# Altium PCB PCB1.PcbDoc (part 5 of 5)
Units mm, origin at the board's own origin, x right, y up, seen from the top; angles counter-clockwise.
Board outline 160 x 110 mm, 4 copper layers (Top Layer, Power Layer, GND Layer, Bottom Layer), stack 1.714 mm thick; 504 components, 362 nets, 1765 pads, 999 vias.
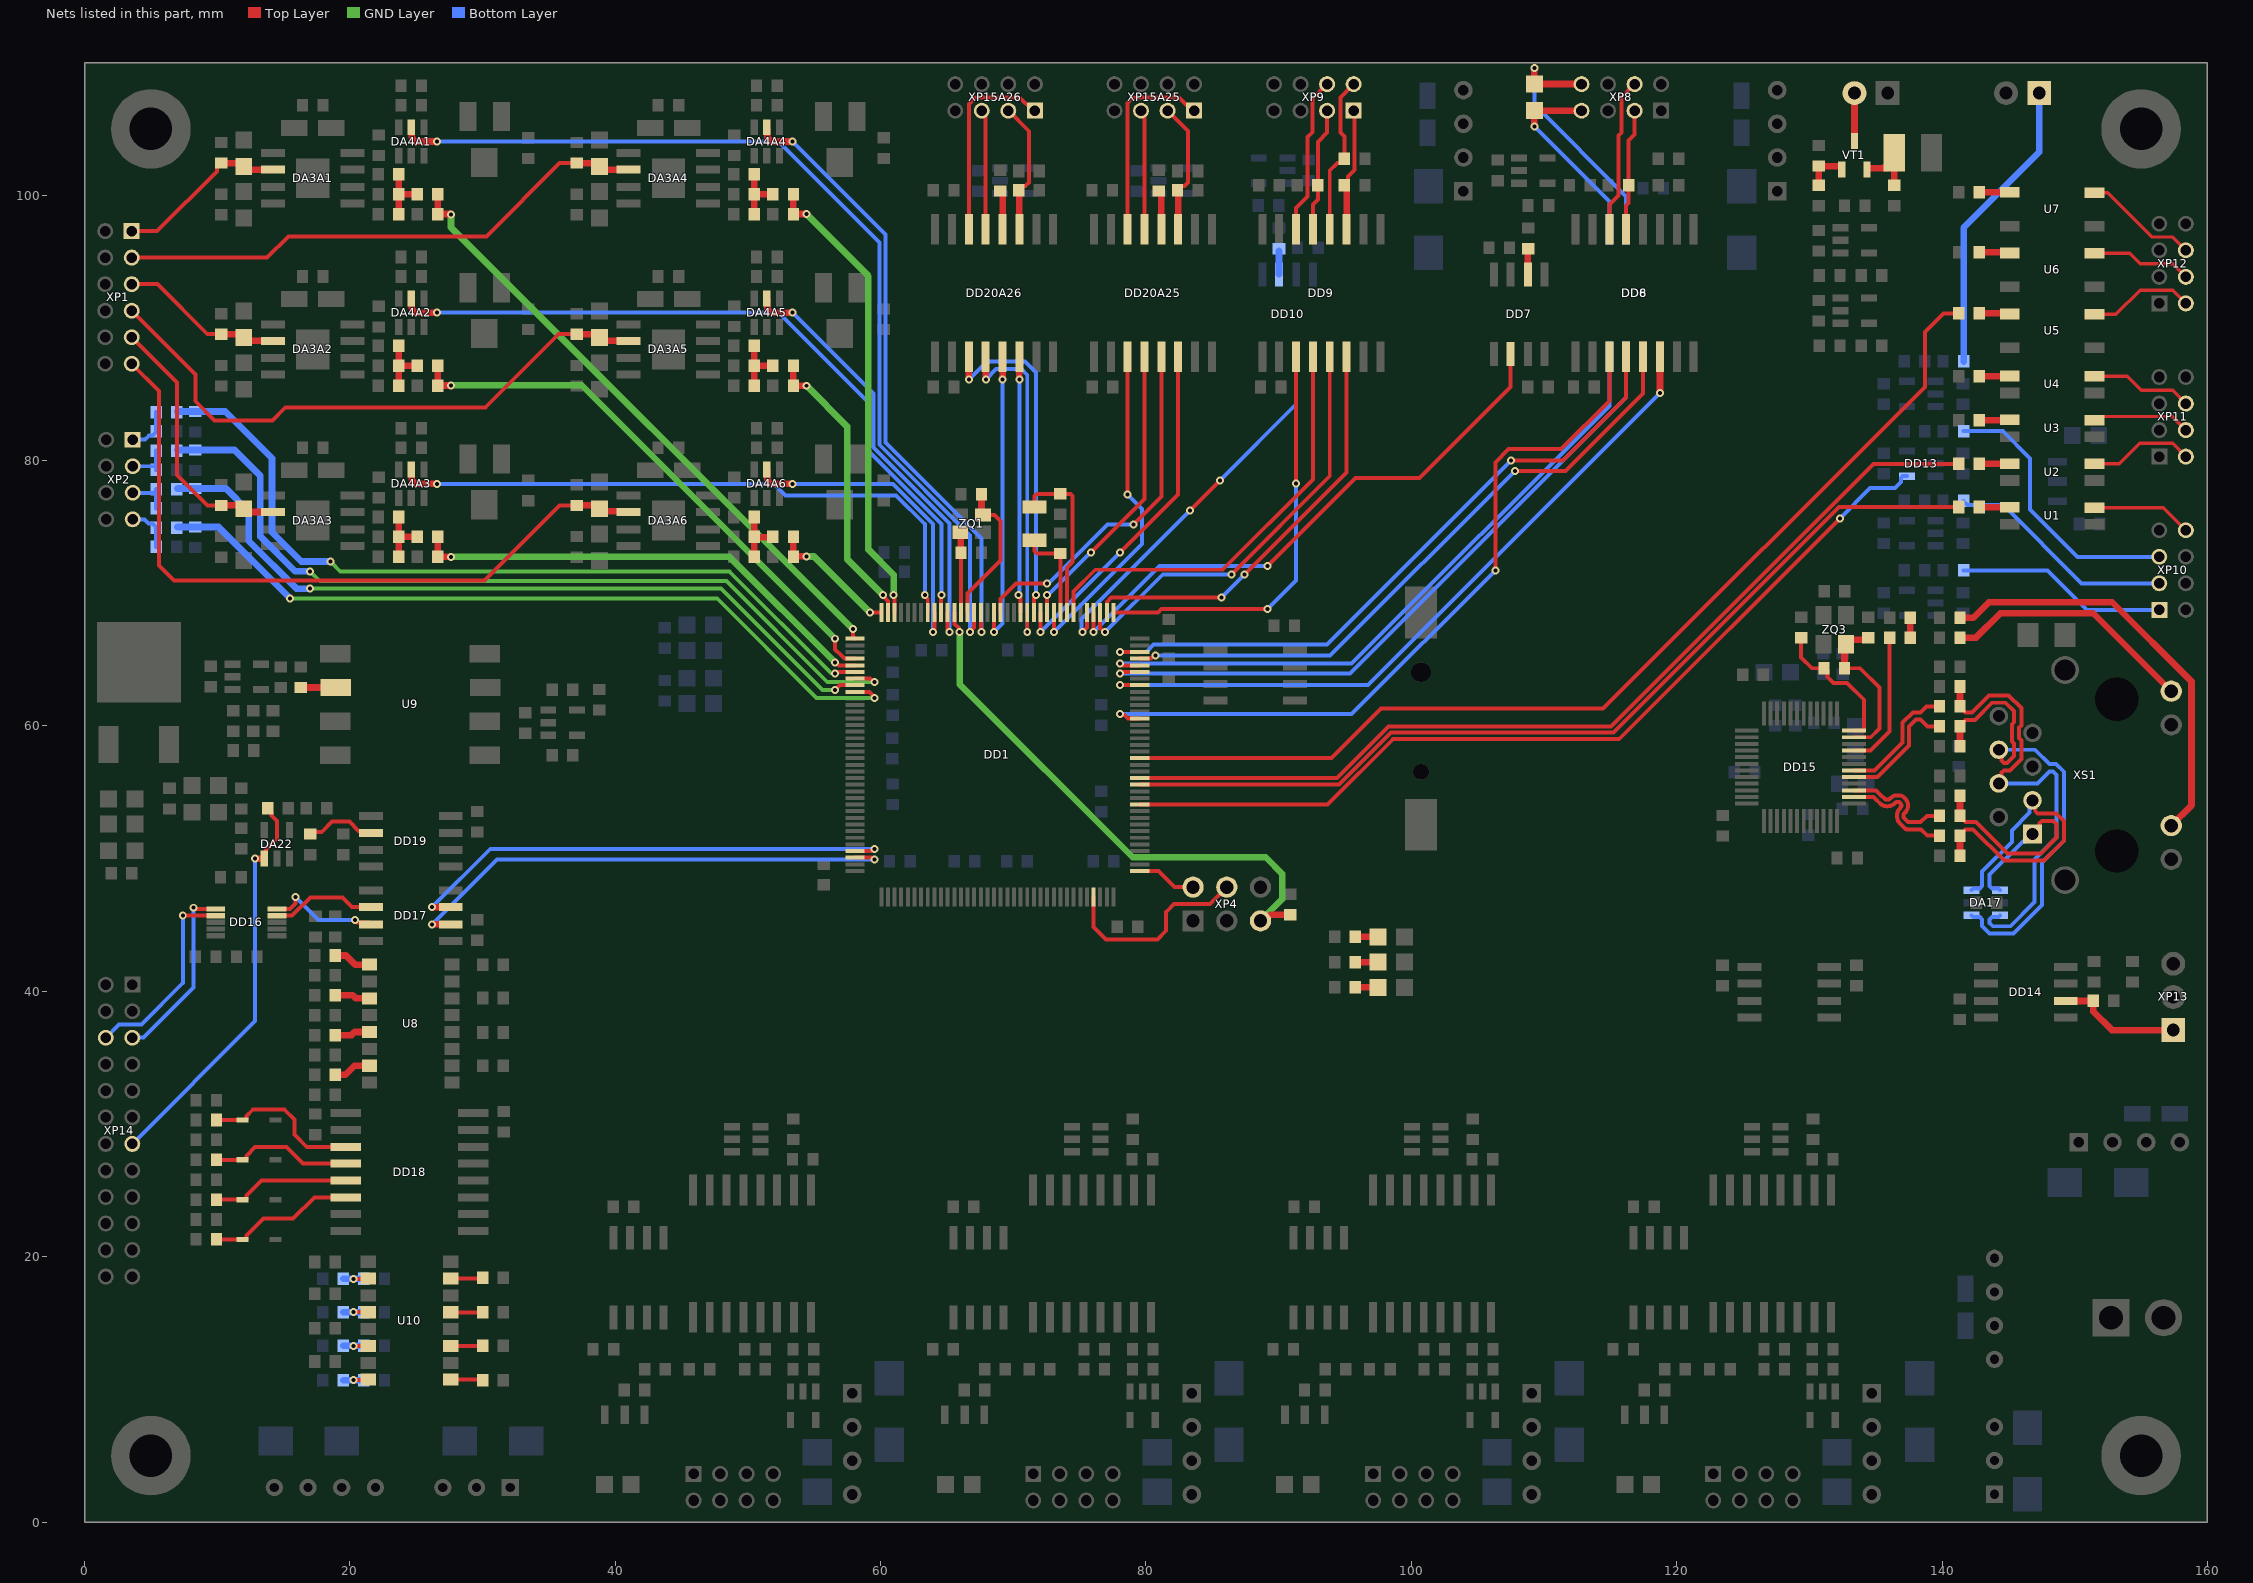
[diagram p6: the nets of this part, all layers, seen from the top]

## Via types
v1: diameter 0.6, hole 0.3, Top Layer to Bottom Layer, tented both sides, 927 vias
v2: diameter 0.6, hole 0.3, Top Layer to Bottom Layer, 72 vias

## Nets (pads, with @x,y where several pads share a name; then routed paths per layer and width w, separated by ;. In a path a pad name is that pad's centre, name@x,y a point inside that pad or via, vN(x,y) a via of type N, cw(c..) or ccw(c..) an arc to the next point about the centre after c; other vN are vias at no path point) (continued)
NetDD6_5: DD6.5 R35.2 XP8.3 | length 9.2
  Top Layer w0.3: DD6.5@116.195,97.428 116.195,99.245 116.375,99.425 R35.2@116.375,100.75 ; R35.2@116.375,100.763 116.375,104.125 116.825,104.575 XP8.3@116.825,106.388
NetDD6_6: DD6.6 XP8.4 | length 11.7
  Top Layer w0.3: DD6.6@114.925,97.428 114.925,99.313 115.6,99.988 115.6,104.488 115.825,104.713 115.825,107.388 XP8.4@116.825,108.388
NetDD7_6: DD7.6 R31.1 | length 2
  Top Layer w0.5: DD7.6@108.776,94.037 R31.1@108.775,96.037
NetDD8_11: DD8.11 R33.1 XP8.7 | length 14.8
  Top Layer w0.5: v1(109.275,105.188) R33.1@109.275,106.388 ; R33.1@109.287,106.375 XP8.7@112.825,106.375
  Bottom Layer w0.3: v1(109.275,105.188) 114.925,99.537 DD8.11@114.925,97.428
NetDD8_12: DD8.12 R33.2 XP8.8 | length 19.8
  Top Layer w0.5: v1(109.275,109.588) R33.2@109.275,108.388 XP8.8@112.812,108.388
  Bottom Layer w0.3: v1(109.275,109.588) 109.275,106.825 116.195,99.905 DD8.12@116.195,97.428
NetDD9_3: DD9.3 R37.2 XP9.1 | length 9.3
  Top Layer w0.3: R37.2@94.95,100.75 95.035,100.835 95.225,101.025 95.225,101.4 95.731,101.906 95.731,106.294 XP9.1@95.65,106.375 ; DD9.3@95.12,97.428 DD9.3@95.122,97.431
  Top Layer w0.5: DD9.3@95.122,97.431 R37.2@95.122,100.747
NetDD9_4: DD9.4 R38.2 XP9.2 | length 12.1
  Top Layer w0.3: DD9.4@93.85,97.428 93.85,101.85 94.425,102.425 94.675,102.425 94.95,102.7 94.95,104.425 94.65,104.725 94.65,107.375 XP9.2@95.65,108.375
NetDD9_5: DD9.5 R39.2 XP9.3 | length 9.4
  Top Layer w0.3: DD9.5@92.58,97.428 92.58,99.305 92.95,99.675 R39.2@92.95,100.75 92.95,104.025 93.65,104.725 XP9.3@93.65,106.375
NetDD9_6: DD9.6 XP9.4 | length 11.9
  Top Layer w0.3: DD9.6@91.31,97.428 91.31,99.035 92.175,99.9 92.175,104.375 92.55,104.75 92.55,107.275 XP9.4@93.65,108.375
NetDD10_6: DD10.6 R36.1 | length 1.8
  Bottom Layer w0.5: R36.1@90,95.8 90.025,95.8 DD10.6@90.025,94.037
NetDD14_2: DD14.2 R53.1 XP13.1 | length 9.5
  Top Layer w0.5: DD14.2@149.325,39.275 R53.1@151.4,39.275 151.4,38.475 152.8,37.075 XP13.1@157.425,37.075
NetDD15_9: DD15.9 R66.2 | length 10.3
  Top Layer w0.3: DD15.9@133.375,58.15 134.6,58.15 136.05,59.6 R66.2@136.05,66.662
NetDD16_4: DD16.4 DD17.6 | length 8
  Top Layer w0.3: DD16.4@14.5,45.7 15.65,45.7 17.025,47.075 19.425,47.075 20.15,46.35 DD17.6@21.6,46.35
NetDD16_5: DD16.5 DD17.7 | length 8.6
  Top Layer w0.3: DD16.5@14.5,46.2 15.475,46.2 15.9,46.625 v1(15.9,47.1) ; v1(20.375,45.375) 20.406,45.375 20.581,45.2 21.45,45.2 DD17.7@21.6,45.05
  Bottom Layer w0.3: v1(15.9,47.1) 17.625,45.375 v1(20.375,45.375)
NetDD18_3: DD18.3 R86.2 VD7.1 | length 12.1
  Top Layer w0.3: R86.2@9.95,30.3 9.975,30.325 10,30.3 VD7.1@11.9,30.3 12.15,30.3 12.2,30.35 12.2,30.6 12.675,31.075 15.075,31.075 15.825,30.325 15.825,29.2 16.745,28.28 DD18.3@19.7,28.28
NetDD18_4: DD18.4 R80.2 VD6.1 | length 10.8
  Top Layer w0.3: R80.2@9.95,27.3 12.15,27.3 12.2,27.35 12.2,27.6 12.85,28.25 15.225,28.25 16.465,27.01 DD18.4@19.7,27.01
NetDD18_5: DD18.5 R87.2 VD5.1 | length 10.5
  Top Layer w0.3: R87.2@9.95,24.3 12.15,24.3 12.2,24.35 12.2,24.6 13.34,25.74 DD18.5@19.7,25.74
NetDD18_6: DD18.6 R81.2 VD4.1 | length 11
  Top Layer w0.3: R81.2@9.95,21.3 VD4.1@11.75,21.3 ; VD4.1@11.7,21.35 VD4.1@11.75,21.3 ; VD4.1@11.9,21.3 VD4.1@11.75,21.3 ; VD4.1@12.2,21.35 12.2,21.6 13.475,22.875 15.725,22.875 17.32,24.47 DD18.6@19.7,24.47
NetDD19_6: DD19.6 R104.1 | length 5.2
  Top Layer w0.3: R104.1@17,51.85 17.175,52.025 17.875,52.025 18.65,52.8 19.95,52.8 20.65,52.1 21.438,52.1 DD19.6@21.513,52.025
NetDD20A25_11: DD20A25.11 R118A25.2 XP15A25.3 | length 10.7
  Top Layer w0.3: XP15A25.3@81.625,106.375 83.15,104.85 83.15,100.95 82.9,100.7 82.65,100.7 82.56,100.61 R118A25.2@82.56,100.535 ; DD20A25.11@82.425,96.586 DD20A25.11@82.425,97.425
  Top Layer w0.5: R118A25.2@82.375,100.375 82.425,100.325 DD20A25.11@82.425,97.425
NetDD20A25_12: DD20A25.12 R117A25.1 | length 3.8
  Top Layer w0.3: R117A25.1@80.875,100.325 80.88,100.325 R117A25.1@81.155,100.05
  Top Layer w0.5: DD20A25.12@81.155,96.606 R117A25.1@81.155,100.05
NetDD20A25_13: DD20A25.13 XP15A25.5 | length 9.1
  Top Layer w0.3: XP15A25.5@79.625,106.375 79.625,106.131 79.885,105.871 DD20A25.13@79.885,97.425
NetDD20A25_14: DD20A25.14 XP15A25.1 | length 15
  Top Layer w0.3: DD20A25.14@78.615,97.425 78.615,106.94 79.05,107.375 82.475,107.375 XP15A25.1@83.475,106.375
NetDD20A26_11: DD20A26.11 R118A26.2 XP15A26.3 | length 10
  Top Layer w0.3: XP15A26.3@69.625,106.375 71.175,104.825 71.175,100.975 70.9,100.7 70.6,100.7 R118A26.2@70.425,100.525
  Top Layer w0.5: R118A26.2@70.4,100.375 70.46,100.315 DD20A26.11@70.46,97.425
NetDD20A26_12: DD20A26.12 R117A26.1 | length 3.1
  Top Layer w0.3: R117A26.1@69,100.4 R117A26.1@69.19,100.21
  Top Layer w0.5: DD20A26.12@69.19,97.425 R117A26.1@69.19,100.21
NetDD20A26_13: DD20A26.13 XP15A26.5 | length 9.1
  Top Layer w0.3: XP15A26.5@67.625,106.375 67.625,106.131 67.92,105.836 DD20A26.13@67.92,97.425
NetDD20A26_14: DD20A26.14 XP15A26.1 | length 15.6
  Top Layer w0.3: DD20A26.14@66.65,96.743 66.65,106.875 67.15,107.375 70.475,107.375 XP15A26.1@71.475,106.375
NetR4_2: R4.2 VD1.1 | length 1.7
  Top Layer w0.5: R4.2@95.775,40.3 VD1.1@97.475,40.3
NetR5_2: R5.2 VD2.1 | length 1.7
  Top Layer w0.5: R5.2@95.775,42.2 VD2.1@97.476,42.2
NetR6_2: R6.2 VD3.1 | length 1.7
  Top Layer w0.5: R6.2@95.775,44.1 VD3.1@97.476,44.1
NetR11A1_2: R11A1.2 R12A1.1 R13A1.1 R14A1.1 | length 4.4
  Top Layer w0.5: R12A1.1@23.675,98.583 R11A1.2@23.675,100.083 ; R14A1.1@23.675,101.575 R11A1.2@23.675,100.083 ; R13A1.1@25.075,100.083 R11A1.2@23.675,100.083
NetR11A2_2: R11A2.2 R12A2.1 R13A2.1 R14A2.1 | length 4.4
  Top Layer w0.5: R12A2.1@23.675,85.658 R11A2.2@23.675,87.158 ; R14A2.1@23.675,88.65 R11A2.2@23.675,87.158 ; R13A2.1@25.075,87.158 R11A2.2@23.675,87.158
NetR11A3_2: R11A3.2 R12A3.1 R13A3.1 R14A3.1 | length 4.4
  Top Layer w0.5: R12A3.1@23.675,72.758 23.675,74.258 R13A3.1@25.075,74.258 ; R11A3.2@23.675,74.25 R14A3.1@23.675,75.75
NetR11A4_2: R11A4.2 R12A4.1 R13A4.1 R14A4.1 | length 4.4
  Top Layer w0.5: R12A4.1@50.475,98.583 R11A4.2@50.475,100.083 ; R14A4.1@50.475,101.575 R11A4.2@50.475,100.083 ; R13A4.1@51.875,100.083 R11A4.2@50.475,100.083
NetR11A5_2: R11A5.2 R12A5.1 R13A5.1 R14A5.1 | length 4.4
  Top Layer w0.5: R12A5.1@50.475,85.65 R11A5.2@50.475,87.15 R14A5.1@50.475,88.65 ; R11A5.2@50.483,87.158 R13A5.1@51.867,87.158
NetR11A6_2: R11A6.2 R12A6.1 R13A6.1 R14A6.1 | length 4.4
  Top Layer w0.5: R12A6.1@50.475,72.758 R11A6.2@50.475,74.258 ; R14A6.1@50.475,75.75 50.475,74.225 R13A6.1@51.875,74.225
NetR22_2: R22.2 R24.2 VT1.1 | length 3.4
  Top Layer w0.5: R22.2@130.7,100.75 R24.2@130.7,102.2 132.325,102.2 132.45,102.075 VT1.1@132.45,101.95
NetR23_2: R23.2 R25.2 VT1.2 | length 4.3
  Top Layer w0.5: VT1.2@134.35,101.95 134.35,102.019 134.375,102.044 135.557,102.044 135.563,102.05 135.85,102.05 R25.2@136.4,102.6 ; R23.2@136.4,100.75 R25.2@136.4,102.6 ; R25.2@136.4,102.694 R25.2@136.4,102.6
NetR26_1: R26.1 XP6.1 | length 22.6
  Bottom Layer w0.5: R26.1@141.625,87.475 141.625,97.55 147.325,103.25 XP6.1@147.325,107.7
NetR40_1: R40.1 XP10.1 | length 16
  Bottom Layer w0.3: R40.1@141.625,71.725 147.95,71.725 150.925,68.75 XP10.1@156.375,68.75
NetR41_1: R41.1 XP10.3 | length 17.4
  Bottom Layer w0.3: R41.1@141.625,76.975 141.625,76.925 141.9,76.65 144.625,76.65 150.525,70.75 XP10.3@156.375,70.75
NetR42_1: R42.1 XP10.5 | length 20.9
  Bottom Layer w0.3: R42.1@141.625,82.225 144.575,82.225 146.625,80.175 146.625,76.325 150.2,72.75 XP10.5@156.375,72.75
NetR46_1: R46.1 U1.1 | length 2.3
  Top Layer w0.254: R46.1@142.8,76.5 R46.1@142.825,76.475
  Top Layer w0.5: R46.1@142.825,76.475 U1.1@145.1,76.475
NetR47_1: R47.1 U2.1 | length 2.3
  Top Layer w0.254: U2.1@145.075,79.75 U2.1@145.1,79.775
  Top Layer w0.5: R47.1@142.8,79.75 U2.1@145.075,79.75
NetR48_1: R48.1 U3.1 | length 2.3
  Top Layer w0.254: U3.1@145.075,83.05 U3.1@145.1,83.075
  Top Layer w0.5: R48.1@142.8,83.05 U3.1@145.075,83.05
NetR49_1: R49.1 U4.1 | length 2.3
  Top Layer w0.254: U4.1@145.075,86.35 U4.1@145.1,86.375
  Top Layer w0.5: R49.1@142.8,86.35 U4.1@145.075,86.35
NetR50_1: R50.1 U5.1 | length 2.3
  Top Layer w0.254: U5.1@145.05,91.1 U5.1@145.1,91.05
  Top Layer w0.5: R50.1@142.8,91.1 U5.1@145.05,91.1
NetR51_1: R51.1 U6.1 | length 2.3
  Top Layer w0.254: U6.1@145.05,95.7 U6.1@145.1,95.65
  Top Layer w0.5: R51.1@142.8,95.7 U6.1@145.05,95.7
NetR52_1: R52.1 U7.1 | length 2.3
  Top Layer w0.5: R52.1@142.8,100.225 U7.1@145.1,100.225
NetR60_1: R60.1 XS1.10 | length 31.9
  Top Layer w0.5: R60.1@141.35,68.162 142.362,68.162 143.525,69.325 152.825,69.325 158.8,63.35 158.8,54.014 XS1.10@157.275,52.489
NetR63_1: R63.1 XS1.12 | length 19.1
  Top Layer w0.5: R63.1@141.35,66.662 142.562,66.662 144.4,68.5 151.395,68.5 XS1.12@157.275,62.619
NetR64_2: R64.2 R66.1 | length 1.5
  Top Layer w0.5: R66.1@137.6,66.662 R64.2@137.6,68.162
NetR82_2: R82.2 U8.1 | length 2.9
  Top Layer w0.5: R82.2@18.9,42.7 19.7,42.7 20.39,42.01 U8.1@21.48,42.01
NetR83_2: R83.2 U8.3 | length 2.7
  Top Layer w0.5: R83.2@18.9,39.7 20.225,39.7 20.455,39.47 U8.3@21.48,39.47
NetR84_2: R84.2 U8.5 | length 2.7
  Top Layer w0.5: R84.2@18.9,36.7 20.125,36.7 20.355,36.93 U8.5@21.48,36.93
NetR85_2: R85.2 U8.7 | length 2.9
  Top Layer w0.5: R85.2@18.9,33.7 19.65,33.7 20.34,34.39 U8.7@21.48,34.39
NetR88_2: R88.2 U9.2 | length 2.6
  Top Layer w0.5: R88.2@16.3,62.9 U9.2@18.925,62.9
NetR96_1: R96.1 U10.1 | length 2.4
  Top Layer w0.3: U10.1@27.6,10.73 29.97,10.73 R96.1@30,10.7
NetR97_1: R97.1 U10.3 | length 2.4
  Top Layer w0.3: U10.3@27.6,13.27 29.97,13.27 R97.1@30,13.3
NetR98_1: R98.1 U10.5 | length 2.4
  Top Layer w0.3: U10.5@27.6,15.81 29.99,15.81 R98.1@30,15.8
NetR99_1: R99.1 U10.7 | length 2.4
  Top Layer w0.3: U10.7@27.6,18.35 29.95,18.35 R99.1@30,18.4
NetR100_1: R100.1 R105.1 U10.16 | length 2.7
  Top Layer w0.3: v1(20.275,10.7) 21.35,10.7 U10.16@21.38,10.73
  Bottom Layer w0.5: R105.1@19.5,10.7 v1(20.275,10.7) R100.1@21.05,10.7
NetR101_1: R101.1 R106.1 U10.14 | length 2.7
  Top Layer w0.3: v1(20.275,13.275) 21.375,13.275 U10.14@21.38,13.27
  Bottom Layer w0.5: R106.1@19.5,13.275 v1(20.275,13.275) R101.1@21.05,13.275
NetR102_1: R102.1 R107.1 U10.12 | length 2.7
  Top Layer w0.3: v1(20.275,15.825) 21.365,15.825 U10.12@21.38,15.81
  Bottom Layer w0.5: R107.1@19.5,15.8 20.275,15.8 R102.1@21.05,15.8
NetR103_1: R103.1 R108.1 U10.10 | length 2.7
  Top Layer w0.3: v1(20.275,18.325) 21.355,18.325 U10.10@21.38,18.35
  Bottom Layer w0.5: R108.1@19.5,18.325 v1(20.275,18.325) R103.1@21.05,18.325
NetU1_4: U1.4 XP10.8 | length 7.6
  Top Layer w0.254: U1.4@151.5,76.45 156.675,76.45 XP10.8@158.375,74.75
NetU2_4: U2.4 XP11.2 | length 7.9
  Top Layer w0.254: U2.4@151.5,79.75 153.35,79.75 154.9,81.3 157.385,81.3 XP11.2@158.385,80.3
NetU3_4: U3.4 XP11.4 | length 7.4
  Top Layer w0.254: U3.4@151.5,83.05 151.773,83.323 152.27,83.323 152.272,83.325 157.36,83.325 XP11.4@158.385,82.3
NetU4_4: U4.4 XP11.6 | length 7.7
  Top Layer w0.254: U4.4@151.5,86.35 153.95,86.35 155,85.3 157.385,85.3 XP11.6@158.385,84.3
NetU5_6: U5.6 XP12.2 | length 8.1
  Top Layer w0.254: U5.6@151.5,91.025 153.1,91.025 154.925,92.85 157.385,92.85 XP12.2@158.385,91.85
NetU6_6: U6.6 XP12.4 | length 7.6
  Top Layer w0.254: U6.6@151.5,95.625 154.15,95.625 154.925,94.85 157.385,94.85 XP12.4@158.385,93.85
NetU7_6: U7.6 XP12.6 | length 8.7
  Top Layer w0.254: U7.6@151.5,100.2 152.5,100.2 155.85,96.85 157.385,96.85 XP12.6@158.385,95.85
NetVT1_3: VT1.3 XP5.2 | length 3.6
  Top Layer w0.5: VT1.3@133.4,104.1 XP5.2@133.4,107.7
NRST: C20.1 DD1.25 XP4.5 | length 42.5
  Top Layer w0.3: DD1.25@65.55,68.55 65.55,67.76 ccw(c65.635,67.76) 65.575,67.7 65.893,67.382 65.893,67.132 v1(65.95,67.075)
  Top Layer w0.5: XP4.5@88.63,45.31 88.928,45.31 89.393,45.775 C20.1@90.875,45.775
  GND Layer w0.5: v1(65.95,67.075) 65.95,63.15 79,50.1 89.025,50.1 90.275,48.85 90.275,46.955 XP4.5@88.63,45.31
OSC32_IN: C13.1 DD1.8 ZQ2.2 | length 12.8
  Top Layer w0.3: ZQ2.2@71.6,76.5 71.6,77.324 71.776,77.5 74.299,77.5 74.475,77.324 74.475,72.35 74.05,71.925 DD1.8@74.05,68.55
OSC32_OUT: C7.1 DD1.9 ZQ2.1 | length 7.3
  Top Layer w0.3: ZQ2.1@71.6,74 71.6,73.176 71.776,73 C7.1@73.55,73 73.55,72.85 73.55,69.125 DD1.9@73.55,68.55
OSC_IN: C12.1 DD1.23 ZQ1.3 | length 11
  Top Layer w0.3: DD1.23@66.55,68.55 66.55,70 69.025,72.475 69.025,75.45 68.575,75.9 ZQ1.3@67.7,75.9
  Top Layer w0.5: C12.1@67.6,77.45 67.6,76 ZQ1.3@67.7,75.9
OSC_OUT: C6.1 DD1.24 ZQ1.1 | length 6.1
  Top Layer w0.3: DD1.24@66.05,68.55 C6.1@66.05,73.05
  Top Layer w0.5: ZQ1.1@66,74.6 66.05,74.55 C6.1@66.05,73.05
PD1: C30A1.2 DA3A1.2 R10A1.2 XP1.1 | length 13.2
  Top Layer w0.3: XP1.1@3.55,97.3 5.475,97.3 9.982,101.807 9.982,102.15 10.257,102.425 C30A1.2@10.3,102.425
  Top Layer w0.5: C30A1.2@10.3,102.425 11.75,102.425 12.25,101.925 DA3A1.2@14.2,101.925
PD1_ADC: C33A1.1 DD1.37 R13A1.2 | length 47.1
  Top Layer w0.3: v1(57.9,67.3) 57.9,66.575 DD1.37@58.075,66.575
  Top Layer w0.5: C33A1.1@26.625,98.575 C33A1.1@26.629,98.571 ; C33A1.1@26.625,98.583 26.625,99.154 R13A1.2@26.625,100.083 ; C33A1.1@26.7,98.586 27.581,98.586 v1(27.6,98.567)
  GND Layer w0.5: v1@27.6,98.575 27.619,98.556 27.619,97.581 v1(57.9,67.3)
PD1_ERR: DA4A1.5 DD1.22 | length 73.1
  Top Layer w0.3: v1(66.75,67.075) 66.75,67.129 67.05,67.429 DD1.22@67.05,68.55
  Top Layer w0.5: DA4A1.5@24.625,105.125 24.65,105.1 24.65,104.35 24.95,104.05 v1(26.55,104.05)
  Bottom Layer w0.3: v1(26.55,104.05) 52.3,104.05 59.9,96.45 59.9,81.196 66.75,74.346 v1(66.75,67.075)
PD2: C30A4.2 DA3A4.2 R10A4.2 XP1.3 | length 40.8
  Top Layer w0.3: XP1.3@3.55,95.3 13.75,95.3 15.354,96.904 30.279,96.904 35.8,102.425 C30A4.2@37.1,102.425
  Top Layer w0.5: C30A4.2@37.1,102.425 38.55,102.425 R10A4.2@38.8,102.175 ; R10A4.2@38.675,102.3 39.05,101.925 DA3A4.2@41,101.925
PD2_ADC: C33A4.1 DD1.34 R13A4.2 | length 35.3
  Top Layer w0.3: v1(60.975,69.875) 60.975,69.794 61.05,69.719 DD1.34@61.05,68.55
  Top Layer w0.5: C33A4.1@53.425,98.583 R13A4.2@53.425,100.083 ; C33A4.1@53.429,98.584 v1@54.399,98.584
  GND Layer w0.5: v1(54.4,98.584) 59.075,93.909 59.075,73.3 60.975,71.4 v1(60.975,69.875)
PD2_ERR: DA4A4.5 DD1.21 | length 47.2
  Top Layer w0.3: DD1.21@67.55,68.55 67.55,67.125 v1(67.6,67.075)
  Top Layer w0.5: DA4A4.5@51.425,105.125 51.45,105.1 51.45,104.343 51.743,104.05 v1(53.35,104.05)
  Bottom Layer w0.3: v1(53.35,104.05) 60.35,97.05 60.35,81.382 67.6,74.132 v1(67.6,67.075)
PD3: C30A2.2 DA3A2.2 R10A2.2 XP1.5 | length 12.4
  Top Layer w0.3: XP1.5@3.55,93.3 5.5,93.3 9.275,89.525 C30A2.2@10.3,89.525
  Top Layer w0.5: C30A2.2@10.3,89.525 11.75,89.525 12.25,89.025 DA3A2.2@14.2,89.025
PD3_ADC: C33A2.1 DD1.40 R13A2.2 | length 42
  Top Layer w0.3: v1(56.575,66.575) 56.575,65.776 57.05,65.301 57.276,65.075 DD1.40@58.075,65.075
  Top Layer w0.5: C33A2.1@26.625,85.65 26.634,85.659 27.591,85.659 v1(27.6,85.667) ; C33A2.1@26.625,85.658 R13A2.2@26.625,87.158
  GND Layer w0.5: v1@27.6,85.675 37.475,85.675 v1(56.575,66.575)
PD3_ERR: DA4A2.5 DD1.27 | length 56.3
  Top Layer w0.3: DD1.27@64.55,68.55 64.55,69.85 v1(64.575,69.875)
  Top Layer w0.5: DA4A2.5@24.625,92.225 24.65,92.2 24.65,91.443 24.943,91.15 v1(26.55,91.15)
  Bottom Layer w0.3: v1(26.55,91.15) 52.3,91.15 59,84.45 59,80.814 64.575,75.239 v1(64.575,69.875)
PD4: C30A5.2 DA3A5.2 R10A5.2 XP1.7 | length 45.3
  Top Layer w0.3: XP1.7@3.55,91.3 8.35,86.5 8.35,84.475 9.8,83.025 14.15,83.025 15.125,84 30.2,84 35.725,89.525 C30A5.2@37.1,89.525
  Top Layer w0.5: C30A5.2@37.1,89.525 R10A5.2@38.55,89.525 ; R10A5.2@38.8,89.275 R10A5.2@38.55,89.525 ; DA3A5.2@41,89.025 39.05,89.025 R10A5.2@38.55,89.525
PD4_ADC: C33A5.1 DD1.35 R13A5.2 | length 22.1
  Top Layer w0.3: v1(60.175,69.875) 60.175,69.794 60.55,69.419 DD1.35@60.55,68.55
  Top Layer w0.5: C33A5.1@53.425,85.65 v1@54.392,85.65 ; C33A5.1@53.425,85.658 R13A5.2@53.425,87.158
  GND Layer w0.5: v1@54.4,85.65 57.475,82.575 57.475,72.575 v1(60.175,69.875)
  other v1: 54.4,85.642
PD4_ERR: DA4A5.5 DD1.26 | length 33.3
  Top Layer w0.3: DD1.26@65.05,68.55 65.05,67.306 65.2,67.156 v1(65.2,67.075)
  Top Layer w0.5: DA4A5.5@51.425,92.225 51.45,92.2 51.45,91.443 51.743,91.15 v1(53.35,91.15)
  Bottom Layer w0.3: v1(53.35,91.15) 59.45,85.05 59.45,81 65.2,75.25 v1(65.2,67.075)
PD5: C30A3.2 DA3A3.2 R10A3.2 XP1.9 | length 20.4
  Top Layer w0.3: XP1.9@3.55,89.3 6.95,85.9 6.95,78.925 9.25,76.625 C30A3.2@10.3,76.625 ; R10A3.2@11.75,76.625 R10A3.2@12,76.375 ; R10A3.2@11.875,76.5 R10A3.2@12.25,76.125
  Top Layer w0.5: C30A3.2@10.3,76.625 R10A3.2@11.75,76.625 ; R10A3.2@12.25,76.125 DA3A3.2@14.2,76.125
PD5_ADC: C33A3.1 DD1.41 R13A3.2 | length 36.3
  Top Layer w0.3: v1(56.575,64.775) 56.656,64.775 56.856,64.575 DD1.41@58.075,64.575
  Top Layer w0.5: C33A3.1@26.625,72.75 R13A3.2@26.625,74.25 ; C33A3.1@26.633,72.742 v1(27.6,72.742)
  GND Layer w0.5: v1(27.6,72.742) 48.608,72.742 v1(56.575,64.775)
PD5_ERR: DA4A3.5 DD1.29 | length 47.6
  Top Layer w0.3: v1(63.325,69.875) 63.325,69.794 63.55,69.569 DD1.29@63.55,68.55
  Top Layer w0.5: DA4A3.5@24.625,79.325 24.65,79.3 24.65,78.543 24.943,78.25 v1(26.55,78.25)
  Bottom Layer w0.3: v1(26.55,78.25) 51.95,78.25 52.825,77.375 61.166,77.375 63.325,75.216 v1(63.325,69.875)
PD6: C30A6.2 DA3A6.2 R10A6.2 XP1.11 | length 54.5
  Top Layer w0.3: XP1.11@3.55,87.3 5.6,85.25 5.6,72.1 6.725,70.975 30.15,70.975 35.8,76.625 C30A6.2@37.1,76.625
  Top Layer w0.5: C30A6.2@37.1,76.625 38.55,76.625 39,76.175 40.95,76.175 DA3A6.2@41,76.125
PD6_ADC: C33A6.1 DD1.36 R13A6.2 | length 9.9
  Top Layer w0.3: v1(59.2,68.55) DD1.36@60.05,68.55
  Top Layer w0.5: C33A6.1@53.425,72.758 R13A6.2@53.425,74.25 R13A6.2@53.425,74.258 ; C33A6.1@53.425,72.783 53.429,72.779 54.396,72.779 v1(54.4,72.775)
  GND Layer w0.5: v1(54.4,72.775) 54.975,72.775 v1(59.2,68.55)
PD6_ERR: DA4A6.5 DD1.28 | length 24.3
  Top Layer w0.3: v1(63.95,67.075) 63.95,67.156 64.05,67.256 DD1.28@64.05,68.55
  Top Layer w0.5: DA4A6.5@51.425,79.325 51.45,79.3 51.45,78.543 51.743,78.25 v1(53.35,78.25)
  Bottom Layer w0.3: v1(53.35,78.25) 60.927,78.25 63.95,75.227 v1(63.95,67.075)
PMO_HW: DA22.1 R114.2 XP14.13 | length 30.5
  Top Layer w0.3: DA22.1@13.55,50 13.675,50.125 13.675,50.675 14.5,51.5 14.5,52.825 14.075,53.25 14.075,53.525 R114.2@13.8,53.8
  Top Layer w0.5: v1(12.85,50) DA22.1@13.55,50
  Bottom Layer w0.3: XP14.13@3.6,28.5 12.85,37.75 v1(12.85,50)
POWER_COL: DD1.126 R50.2 | length 78
  Top Layer w0.3: DD1.126@79.525,57.575 93.984,57.575 97.709,61.3 114.458,61.3 138.708,85.55 138.708,89.683 140.125,91.1 R50.2@141.25,91.1
POWER_IND: DD1.123 R47.2 | length 71.5
  Top Layer w0.3: DD1.123@79.525,56.075 94.393,56.075 98.268,59.95 115.034,59.95 134.834,79.75 R47.2@141.25,79.75
PS1_ERR1: DD1.137 DD6.14 | length 54
  Top Layer w0.3: v1(78.05,63.075) DD1.137@79.525,63.075 ; DD6.14@118.735,87.828 DD6.14@118.742,87.82 ; v1@118.742,85.108 v1(118.75,85.1)
  Top Layer w0.5: v1@118.742,85.108 DD6.14@118.742,87.82
  Bottom Layer w0.3: v1(78.05,63.075) 96.725,63.075 v1(118.75,85.1)
PS1_ERR2: DD1.141 DD6.13 | length 49
  Top Layer w0.3: DD1.141@79.525,65.075 80.394,65.075 80.619,65.3 v1(80.7,65.3) ; v1(107.8,79.225) 111.625,79.225 117.465,85.065 DD6.13@117.465,87.828
  Bottom Layer w0.3: v1(80.7,65.3) 93.875,65.3 v1(107.8,79.225)
PS1_ERR3: DD1.142 DD6.12 | length 50.6
  Top Layer w0.3: v1(78.05,65.575) 78.8,65.575 DD1.142@79.525,65.575 ; v1(107.509,79.994) 111.419,79.994 116.195,84.77 DD6.12@116.195,87.828
  Bottom Layer w0.3: v1(78.05,65.575) 80.025,65.575 80.575,66.125 93.64,66.125 v1(107.509,79.994)
PS1_ON: DD1.132 DD6.11 | length 56.4
  Top Layer w0.3: v1(78.05,60.9) 78.107,60.843 78.382,60.843 78.65,60.575 DD1.132@79.525,60.575 ; v1(106.325,71.725) 106.325,79.875 107.319,80.869 111.294,80.869 114.925,84.5 DD6.11@114.925,87.828
  Bottom Layer w0.3: v1(78.05,60.9) 95.5,60.9 v1(106.325,71.725)
PS1_PV: DD1.4 DD7.2 | length 43.1
  Top Layer w0.3: v1(76.034,67.066) 76.05,67.082 DD1.4@76.05,68.55 ; v1(89.15,72.05) 95.775,78.675 100.6,78.675 107.476,85.551 DD7.2@107.476,88.037
  Bottom Layer w0.3: v1(76.034,67.066) 81.018,72.05 v1(89.15,72.05)
PS2_ERR1: DD1.2 DD9.14 | length 31.6
  Top Layer w0.3: DD1.2@77.05,68.55 77.05,69.349 77.376,69.675 v1(85.675,69.675) ; v1(87.425,71.425) 95.12,79.12 DD9.14@95.12,87.828
  Bottom Layer w0.3: v1(85.675,69.675) v1(87.425,71.425)
PS2_ERR2: DD1.3 DD9.13 | length 32.5
  Top Layer w0.3: DD1.3@76.55,68.55 76.55,67.383 76.864,67.069 v1(76.906,67.069) ; v1(86.45,71.425) 93.85,78.825 DD9.13@93.85,87.828
  Bottom Layer w0.3: v1(76.906,67.069) 81.263,71.425 v1(86.45,71.425)
PS2_ERR3: DD1.7 DD9.12 | length 32.4
  Top Layer w0.3: DD1.7@74.55,68.55 74.55,70.15 76.175,71.775 85.775,71.775 92.58,78.58 DD9.12@92.58,87.828
PS2_ON: DD1.1 DD9.11 | length 31.6
  Top Layer w0.3: DD1.1@77.55,68.55 80.901,68.55 81.151,68.8 v1(89.15,68.8) ; v1(91.31,78.283) DD9.11@91.31,87.828
  Bottom Layer w0.3: v1(89.15,68.8) 91.31,70.96 v1(91.31,78.283)
PS2_PV: DD1.5 DD10.2 | length 29.3
  Top Layer w0.3: v1(75.2,67.075) 75.55,67.425 DD1.5@75.55,68.55 ; v1(83.325,76.25) 83.325,76.255 85.575,78.505 v1(85.575,78.51)
  Bottom Layer w0.3: v1(75.2,67.075) 75.143,67.132 75.143,68.068 v1(83.325,76.25) ; v1(85.575,78.51) 91.325,84.26 DD10.2@91.325,88.037
RD_N: DA17.4 R56.1 R59.2 XS1.6 | length 35.7
  Top Layer w0.3: R59.2@141.35,59.975 141.35,60.025 141.773,60.448 142.473,60.448 143.775,61.75 144.792,61.75 145.421,61.121 145.421,60.281 145.261,60.121 145.261,58.847 145.421,58.687 145.421,57.727 144.908,57.214 144.66,57.214 144.484,57.39 144.484,57.998 XS1.6@144.275,58.207
  Top Layer w0.381: R59.2@141.35,59.975 R59.2@141.35,60.025
  Top Layer w0.5: R56.1@141.35,58.475 R59.2@141.35,59.975
  Bottom Layer w0.3: DA17.4@142.225,45.725 142.35,45.6 142.847,45.6 143.023,45.424 143.023,44.919 143.592,44.35 145.375,44.35 147.529,46.504 147.529,49.704 149.175,51.35 149.175,56.55 148.599,57.126 148.099,57.126 147.018,58.207 XS1.6@144.275,58.207
RD_P: DA17.3 R57.1 R62.2 XS1.4 | length 34.7
  Top Layer w0.3: R62.2@141.35,61.475 141.35,61.425 141.773,61.002 142.244,61.002 143.546,62.304 145.021,62.304 145.975,61.35 145.975,60.051 145.815,59.891 145.815,59.077 145.975,58.917 145.975,57.497 145.138,56.66 144.66,56.66 144.484,56.484 144.484,55.876 XS1.4@144.275,55.667
  Top Layer w0.381: R62.2@141.35,61.425 R62.2@141.35,61.475
  Top Layer w0.5: R62.2@141.35,61.475 R57.1@141.35,62.975
  Bottom Layer w0.3: XS1.4@144.275,55.667 147.192,55.667 148.097,56.572 148.369,56.572 148.621,56.321 148.621,51.579 146.975,49.933 146.975,46.733 145.146,44.904 143.821,44.904 143.577,45.148 143.577,45.424 143.753,45.6 144.25,45.6 DA17.3@144.375,45.725
Rx232: DD1.70 DD17.2 | length 38.3
  Top Layer w0.3: DD1.70@58.075,50.075 59.319,50.075 59.469,49.925 v1(59.55,49.925)
  Top Layer w0.5: v1(26.2,45.05) DD17.2@27.6,45.05
  Bottom Layer w0.3: v1(26.2,45.05) 31.075,49.925 v1(59.55,49.925)
Rx232_HW: DD16.7 XP14.6 | length 15.1
  Top Layer w0.3: v1(7.4,45.7) DD16.7@9.9,45.7
  Bottom Layer w0.3: XP14.6@1.6,36.5 2.6,37.5 4.275,37.5 7.4,40.625 v1(7.4,45.7)
RxCAN: DD1.139 DD8.5 | length 51.4
  Top Layer w0.3: v1(78.05,63.95) 78.131,63.95 78.256,64.075 DD1.139@79.525,64.075
  Bottom Layer w0.3: v1(78.05,63.95) 95.386,63.95 116.195,84.759 DD8.5@116.195,87.828
RXI_N: DD15.5 R59.1 | length 9.3
  Top Layer w0.3: DD15.5@133.375,56.15 135.131,56.15 137.525,58.544 137.525,59.967 138.033,60.475 138.387,60.475 138.833,60.029 138.887,59.975 R59.1@139.8,59.975
RXI_P: DD15.6 R62.1 | length 9.3
  Top Layer w0.3: DD15.6@133.375,56.65 134.924,56.65 137.025,58.751 137.025,60.174 137.025,60.25 137.804,61.029 138.379,61.029 138.825,61.475 R62.1@139.8,61.475
SF1_CUR_SET: DD1.18 DD20A25.5 | length 26.9
  Top Layer w0.3: DD1.18@69.05,68.55 69.05,69.575 70.2,70.725 v1(72.55,70.725) ; v1(79.05,75.175) 81.155,77.28 DD20A25.5@81.155,87.825
  Bottom Layer w0.3: v1(72.55,70.725) 72.631,70.725 72.781,70.875 72.799,70.875 77.099,75.175 v1(79.05,75.175)
SF1_EN: DD1.10 DD20A25.3 | length 25.4
  Top Layer w0.3: v1(73.05,67.075) DD1.10@73.05,68.55 ; v1(78.615,77.435) DD20A25.3@78.615,87.825
  Bottom Layer w0.3: v1(73.05,67.075) 79.7,73.725 79.7,76.35 v1(78.615,77.435)
SF1_ERR: DD1.12 DD20A25.6 | length 26.5
  Top Layer w0.3: v1(72.05,67.075) DD1.12@72.05,68.55 ; v1(78.05,73.075) 82.425,77.45 DD20A25.6@82.425,87.825
  Bottom Layer w0.3: v1(72.05,67.075) v1(78.05,73.075)
SF1_IL: DD1.11 DD20A25.4 | length 22.4
  Top Layer w0.3: DD1.11@72.55,68.55 v1(72.55,69.875) ; v1(75.85,73.075) 79.885,77.11 DD20A25.4@79.885,87.825
  Bottom Layer w0.3: v1(72.55,69.875) 72.6,69.875 75.8,73.075 v1(75.85,73.075)
SF2_CUR_SET: DD1.19 DD20A26.5 | length 22.5
  Top Layer w0.3: v1(68.55,67.075) DD1.19@68.55,68.55 ; DD20A26.5@69.19,87.825 DD20A26.5@69.195,87.82 ; v1@69.195,86.105 v1(69.2,86.1)
  Top Layer w0.5: v1@69.195,86.105 DD20A26.5@69.195,87.82
  Bottom Layer w0.3: v1(68.55,67.075) 69.2,67.725 v1(69.2,86.1)
SF2_EN: DD1.13 DD20A26.3 | length 25.8
  Top Layer w0.3: DD1.13@71.55,68.55 71.55,69.644 71.7,69.794 v1(71.7,69.875)
  Top Layer w0.5: v1(66.65,86.1) DD20A26.3@66.65,87.825
  Bottom Layer w0.3: v1(66.65,86.1) 68.025,87.475 70.875,87.475 71.7,86.65 v1(71.7,69.875)
SF2_ERR: DD1.15 DD20A26.6 | length 19.4
  Top Layer w0.3: v1(70.4,69.875) 70.4,69.794 70.55,69.644 DD1.15@70.55,68.55 ; v1(70.45,86.1) v1@70.455,86.105 ; DD20A26.6@70.455,87.82 DD20A26.6@70.46,87.825
  Top Layer w0.5: v1@70.455,86.105 DD20A26.6@70.455,87.82
  Bottom Layer w0.3: v1(70.4,69.875) 70.45,69.925 v1(70.45,86.1)
SF2_IL: DD1.14 DD20A26.4 | length 26.2
  Top Layer w0.3: DD20A26.4@67.92,87.825 DD20A26.4@67.922,87.822 ; v1@67.922,86.103 v1(67.925,86.1) ; v1(71.05,67.075) DD1.14@71.05,68.55
  Top Layer w0.5: v1@67.922,86.103 DD20A26.4@67.922,87.822
  Bottom Layer w0.3: v1(67.925,86.1) 67.925,86.125 68.7,86.9 70.6,86.9 71.05,86.45 v1(71.05,67.075)
START_BUT: DD1.119 DD13.4 | length 68.3
  Top Layer w0.3: DD1.119@79.525,54.075 93.675,54.075 98.6,59 115.65,59 v1(132.3,75.65)
  Bottom Layer w0.3: v1(132.3,75.65) 134.575,77.925 136.45,77.925 136.9,78.375 136.9,78.7 137.025,78.825 DD13.4@137.35,78.825
START_IND: DD1.122 R46.2 | length 70.4
  Top Layer w0.3: DD1.122@79.525,55.575 94.53,55.575 98.455,59.5 115.226,59.5 132.226,76.5 R46.2@141.25,76.5
SWCLK: DD1.109 XP4.2 | length 4.5
  Top Layer w0.3: DD1.109@79.525,49.075 80.925,49.075 82.15,47.85 XP4.2@83.55,47.85
SWDIO: DD1.105 XP4.4 | length 15.1
  Top Layer w0.3: DD1.105@76.05,47.1 76.05,44.85 77,43.9 80.85,43.9 81.525,44.575 81.525,45.975 82.125,46.575 84.815,46.575 XP4.4@86.09,47.85
T1: R17A7.2 R18A7.1 XP2.1 | length 3.5
  Bottom Layer w0.3: XP2.1@3.625,81.575 4.55,81.575 4.85,81.875 5.125,81.875 5.4,82.15 R18A7.1@5.4,83.65
T1_ADC: C37A7.1 DD1.42 R18A7.2 | length 62.6
  Top Layer w0.3: v1(56.575,63.95) 56.656,63.95 56.781,64.075 DD1.42@58.075,64.075
  GND Layer w0.3: v1(18.525,72.4) 19.3,71.625 48.625,71.625 56.243,64.007 56.518,64.007 v1(56.575,63.95)
  Bottom Layer w0.3: R18A7.2@6.95,83.65 R18A7.2@7,83.7
  Bottom Layer w0.5: R18A7.2@7,83.7 C37A7.1@8.35,83.7 10.6,83.7 14.125,80.175 14.125,74.6 16.325,72.4 v1(18.525,72.4)
T2: R17A8.2 R18A8.1 XP2.3 | length 3.5
  Bottom Layer w0.3: XP2.3@3.625,79.575 5.275,79.575 R17A8.2@5.55,79.3 ; R17A8.2@5.4,79.3 R18A8.1@5.4,80.75
T2_ADC: C37A8.1 DD1.43 R18A8.2 | length 64.1
  Top Layer w0.3: DD1.43@58.075,63.575 59.211,63.575 59.461,63.325 v1(59.525,63.325)
  GND Layer w0.3: v1(17,71.65) 17.725,70.925 48.375,70.925 55.975,63.325 v1(59.525,63.325)
  Bottom Layer w0.3: R18A8.2@6.95,80.75 R18A8.2@7,80.8
  Bottom Layer w0.5: R18A8.2@7,80.8 C37A8.1@8.35,80.8 11.3,80.8 13.25,78.85 13.25,74.275 15.875,71.65 v1(17,71.65)
T3: R17A9.2 R18A9.1 XP2.5 | length 3.4
  Bottom Layer w0.3: XP2.5@3.625,77.575 5.2,77.575 R18A9.1@5.475,77.85 ; R17A9.2@5.4,76.4 R18A9.1@5.4,77.85
T3_ADC: C37A9.1 DD1.44 R18A9.2 | length 58.9
  Top Layer w0.3: v1(56.575,62.7) 56.95,63.075 DD1.44@58.075,63.075
  GND Layer w0.3: v1(17,70.35) 47.975,70.35 55.625,62.7 v1(56.575,62.7)
  Bottom Layer w0.3: R18A9.2@6.95,77.85 R18A9.2@7,77.9
  Bottom Layer w0.5: R18A9.2@7,77.9 C37A9.1@8.35,77.9 10.65,77.9 12.375,76.175 12.375,73.95 15.975,70.35 v1(17,70.35)
T4: R17A10.2 R18A10.1 XP2.7 | length 3.5
  Bottom Layer w0.3: XP2.7@3.625,75.575 4.519,75.575 4.819,75.275 5.125,75.275 5.4,75 R17A10.2@5.4,73.5
T4_ADC: C37A10.1 DD1.45 R18A10.2 | length 59.7
  Top Layer w0.3: DD1.45@58.075,62.575 59.175,62.575 59.175,62.556 59.55,62.181 v1(59.55,62.1)
  GND Layer w0.3: v1(15.475,69.6) 15.5,69.625 47.649,69.625 55.174,62.1 v1(59.55,62.1)
  Bottom Layer w0.3: R18A10.2@6.95,74.95 R18A10.2@7,75
  Bottom Layer w0.5: R18A10.2@7,75 C37A10.1@8.35,75 10.1,75 15.475,69.625 v1(15.475,69.6)
TD_N: DA17.6 R54.1 R58.2 XS1.3 | length 25
  Top Layer w0.3: R58.2@141.35,51.727 141.35,51.777 141.774,52.2 142.341,52.2 144.692,49.85 147.675,49.85 149.175,51.35 149.175,52.833 148.604,53.404 147.2,53.404 147.024,53.58 147.024,54.188 XS1.3@146.815,54.397
  Top Layer w0.5: R54.1@141.35,50.228 R58.2@141.35,51.727
  Bottom Layer w0.3: DA17.6@142.225,47.625 142.35,47.75 142.847,47.75 143.023,47.926 143.023,49.022 145.268,51.267 145.268,52.134 146.606,53.472 146.606,54.188 XS1.3@146.815,54.397
TD_P: DA17.1 R55.1 R61.2 XS1.1 | length 20.3
  Top Layer w0.3: R61.2@141.35,53.228 141.35,53.178 141.774,52.754 142.571,52.754 144.921,50.404 147.446,50.404 148.621,51.579 148.621,52.604 148.375,52.85 147.522,52.85 147.346,52.674 147.346,52.388 XS1.1@146.815,51.857
  Top Layer w0.5: R61.2@141.35,53.228 R55.1@141.35,54.728
  Bottom Layer w0.3: DA17.1@144.375,47.625 144.25,47.75 143.753,47.75 143.577,47.926 143.577,48.792 146.092,51.307 146.265,51.307 XS1.1@146.815,51.857
Tx232: DD1.69 DD17.3 | length 38.1
  Top Layer w0.3: DD1.69@58.075,50.575 59.319,50.575 59.469,50.725 v1(59.55,50.725)
  Top Layer w0.5: v1(26.2,46.35) DD17.3@27.6,46.35
  Bottom Layer w0.3: v1(26.2,46.35) 30.575,50.725 v1(59.55,50.725)
Tx232_HW: DD16.6 XP14.5 | length 13.9
  Top Layer w0.3: v1(8.2,46.3) 8.281,46.3 8.381,46.2 DD16.6@9.9,46.2
  Bottom Layer w0.3: XP14.5@3.6,36.5 3.63,36.53 4.455,36.53 8.2,40.275 v1(8.2,46.3)
TxCAN: DD1.140 DD8.6 | length 50.2
  Top Layer w0.3: v1(78.05,64.7) 78.131,64.7 78.256,64.575 DD1.140@79.525,64.575
  Bottom Layer w0.3: v1(78.05,64.7) 95.5,64.7 114.925,84.125 DD8.6@114.925,87.828
TXO_N: DD15.2 R58.1 | length 8.9
  Top Layer w0.3: DD15.2@133.375,54.65 134.83,54.65 135.021,54.459 135.304,54.176 ccw(c135.869,54.742) 136.435,54.176 136.458,54.199 cw(c136.652,54.005) 136.847,54.199 cw(c136.652,54.005) 136.847,53.81 ccw(c137.024,53.633) 136.846,53.809 136.824,53.787 ccw(c137.39,53.222) 136.824,52.656 137.252,52.227 137.316,52.227 137.343,52.2 137.747,52.2 138.425,52.2 138.898,51.727 R58.1@139.8,51.727
TXO_P: DD15.3 R61.1 | length 8.9
  Top Layer w0.3: DD15.3@133.375,55.15 135.037,55.15 135.374,54.812 135.657,54.53 ccw(c135.869,54.742) 136.081,54.53 136.106,54.554 cw(c136.652,54.005) 137.2,54.553 cw(c136.652,54.005) 137.274,53.541 137.274,53.53 137.177,53.434 ccw(c137.39,53.222) 137.177,53.009 137.432,52.754 138.301,52.754 138.379,52.754 138.853,53.228 R61.1@139.8,53.228
XSCI: DD15.12 R65.2 R67.1 | length 10.8
  Top Layer w0.3: R67.1@129.375,66.65 129.375,65.175 130.2,64.35 R65.2@131.1,64.35 131.375,64.075 131.375,63.7 131.825,63.25 132.85,63.25 134.125,61.975 134.125,59.65 DD15.12@133.375,59.65
XSCO: C92.1 DD15.11 R65.1 ZQ3.1 | length 12.2
  Top Layer w0.3: R65.1@132.65,64.35 133.825,64.35 135.275,62.9 135.275,59.8 134.625,59.15 DD15.11@133.375,59.15
  Top Layer w0.5: R65.1@132.65,64.35 132.65,66.025 133.125,66.5 134.3,66.5 C92.1@134.45,66.65
pads on no net: DA1.3 DA1.5 DA1.8 DA2.4 DA3A1.5 DA3A2.5 DA3A3.5 DA3A4.5 DA3A5.5 DA3A6.5 DA20.3 DA20.5 DA20.8 DD1.49 DD1.50 DD1.67 DD1.68 DD1.104 DD3.1 DD4A13.7 DD4A13.11 DD4A14.7 DD4A14.11 DD4A15.7 DD4A15.11 DD4A16.7 DD4A16.11 DD8.1 DD8.4 DD8.10 DD8.14 DD8.15 DD11.1 DD12.1 DD13.1 DD15.18 DD15.19 DD15.21 DD15.34 DD15.35 DD15.37 DD15.38 DD15.39 DD15.40 DD15.41 DD15.42 DD15.43 DD15.44 DD18.7 U9.7 U9.8 XP4.6 XP7A13.8 XP7A14.8 XP7A15.8 XP7A16.8 XP9.7 XP9.8 XP11.7 XP11.8 XP12.7 XP12.8 XP15A25.7 XP15A25.8 XP15A26.7 XP15A26.8 XS1. XS1.7 XS1.8

## Polygon pours and split planes (outlines as drawn)
AGND on Top Layer "AGND_L01_P027" (solid, remove dead copper, pour order 27): 45.675,60.425 40.875,55.625 26.625,55.625 26.625,68.25 25.625,69.25 0,69.25 0,101.5 8.5,101.5 8.5,110 61.625,110 61.625,71.5 49.175,71.5 45.675,68
GND on Top Layer "GND_L01_P038" (solid, remove dead copper, pour order 38): 26.625,54.5 26.625,9 31.875,9 37.875,15 37.875,19.5 43.625,19.5 46.375,22.25 62.25,22.25 65,19.5 68.375,19.5 71.125,22.25 87.875,22.25 90.625,19.5 94,19.5 96.75,22.25 113.525,22.25 116.275,19.5 119.75,19.5 122.5,22.25 134.25,22.25 140.375,16.125 145.125,16.125 145.125,42.75 148.15,45.775 160,45.775 160,77 154.5,77 154.5,75.25 152.375,73.125 146.25,73.125 146.25,101.875 150.375,106 150.375,110 130.625,110 130.625,106 129.375,104.75 129.375,94.3 125.075,90 64.25,90 63,88.75 63,69.35 49.225,69.35 47.5,67.625 47.5,60.125 41.875,54.5
GND_PS on Top Layer "GND_PS_L01_P023" (solid, remove dead copper, pour order 23): 87.25,110 87.25,95.225 98.75,95.225 98.75,110
AGND_HW on Top Layer "AGND_HW_L01_P033" (solid, remove dead copper, pour order 33): 2.8,49.4 2.8,48.1 19.1,48.1 20,49 20,68 8,68 8,59 8,51.5 2.8,51.5
GND_HW on Top Layer "GND_HW_L01_P032" (solid, remove dead copper, pour order 32): 0.5,68 7.1,68 7.1,52 2.8,52 2.8,47 23.2,47 23.2,9 17.5,9 15.7,7.2 15.7,4.5 10,4.5 10,9.25 0.5,9.25
GND_DRVA14 on Top Layer "GND_DRVA14_L01_P029" (solid, remove dead copper, pour order 29): 63.375,0 63.375,15.75 65,17.375 81.75,17.375 81.75,0
GND_DRVA16 on Top Layer "GND_DRVA16_L01_P031" (solid, remove dead copper, pour order 31): 114.625,0 114.625,15.75 116.25,17.375 133,17.375 133,0
GND_DRVA13 on Top Layer "GND_DRVA13_L01_P030" (solid, remove dead copper, pour order 30): 37.75,0 37.75,14 41.125,17.375 56.125,17.375 56.125,0
GND_DRVA15 on Top Layer "GND_DRVA15_L01_P016" (solid, remove dead copper, pour order 16): 89,0 89,15.75 90.625,17.375 107.375,17.375 107.375,0
GND_PS_CAN on Top Layer "GND_PS_CAN_L01_P025" (solid, remove dead copper, pour order 25): 105.75,110 105.75,95.225 122.375,95.225 122.375,110
GND_SFA26 on Top Layer "GND_SFA26_L01_P020" (solid, remove dead copper, pour order 20): 74.1,95.25 74.1,110 63,110 63,95.25
GND_SFA25 on Top Layer "GND_SFA25_L01_P021" (solid, remove dead copper, pour order 21): 74.975,110 74.975,95.25 86.075,95.25 86.075,110
GND_FS on Top Layer "GND_FS_L01_P008" (solid, pour order 8): 160,44.75 149.75,44.75 147.25,42.25 147.25,34.125 160,34.125
AGND on Bottom Layer "AGND_L04_P000" (solid, remove dead copper, pour order 0): 45.675,60.425 40.875,55.625 26.625,55.625 26.625,68.25 25.625,69.25 0,69.25 0,101.5 8.5,101.5 8.5,110 61.625,110 61.625,70.875 48.55,70.875 45.675,68
GND_SFA26 on Bottom Layer "GND_SFA26_L04_P037" (solid, pour order 37): 74.1,93 74.1,110 63,110 63,93
GND_SFA25 on Bottom Layer "GND_SFA25_L04_P036" (solid, pour order 36): 74.975,110 74.975,93 86.075,93 86.075,110
GND_PS_CAN on Bottom Layer "GND_PS_CAN_L04_P035" (solid, pour order 35): 105.75,110 105.75,93 122.375,93 122.375,110
GND on Bottom Layer "GND_L04_P009" (solid, remove dead copper, pour order 9): 150.375,110 150.375,106 146.25,101.875 146.25,73.125 152.375,73.125 154.5,75.25 154.5,77 160,77 160,46.125 148.5,46.125 145.125,42.75 145.125,16.125 140.375,16.125 136.875,19.625 37.875,19.625 37.875,15.625 31.875,9.625 26.625,9.625 26.625,54.5 41.875,54.5 47.5,60.125 47.5,67.625 49.225,69.35 63,69.35 63,90 125.075,90 129.375,94.3 129.375,104.75 130.625,106 130.625,110
GND_PS on Bottom Layer "GND_PS_L04_P034" (solid, pour order 34): 87.25,110 87.25,93 98.75,93 98.75,110
GND_DRVA16 on Bottom Layer "GND_DRVA16_L04_P013" (solid, remove dead copper, pour order 13): 114.625,0 114.625,15.75 116.25,17.375 133,17.375 133,0
GND_DRVA14 on Bottom Layer "GND_DRVA14_L04_P010" (solid, remove dead copper, pour order 10): 63.375,0 63.375,15.75 65,17.375 81.75,17.375 81.75,0
GND_DRVA13 on Bottom Layer "GND_DRVA13_L04_P011" (solid, remove dead copper, pour order 11): 37.75,0 37.75,13.375 41.75,17.375 56.125,17.375 56.125,0
GND_DRVA15 on Bottom Layer "GND_DRVA15_L04_P028" (solid, remove dead copper, pour order 28): 89,0 89,15.75 90.625,17.375 107.375,17.375 107.375,0
GND_FS on Bottom Layer "GND_FS_L04_P007" (solid, pour order 7): 160,44.75 149.75,44.75 147.25,42.25 147.25,34.125 160,34.125
GND_HW on Bottom Layer "GND_HW_L04_P004" (solid, remove dead copper, pour order 4): 0.5,68 7.5,68 7.5,52 2.8,52 2.8,47 23.2,47 23.2,9 17.5,9 15.7,7.2 15.7,4.5 10,4.5 10,9.25 0.5,9.25
AGND_HW on Bottom Layer "AGND_HW_L04_P003" (solid, remove dead copper, pour order 3): 2.8,49.4 2.8,48.1 19.1,48.1 20,49 20,68 8,68 8,51.5 2.8,51.5
AGND on GND Layer "AGND_L03_P005" (solid, remove dead copper, pour order 5): 45.675,60.425 40.875,55.625 26.625,55.625 26.625,68.25 25.625,69.25 0,69.25 0,101.5 8.5,101.5 8.5,110 61.625,110 61.625,71.5 49.175,71.5 45.675,68
GND on GND Layer "GND_L03_P006" (solid, remove dead copper, pour order 6): 26.625,54.5 26.625,9 30.425,9 37.875,16.45 37.875,22.25 46.375,22.25 62.25,22.25 71.125,22.25 87.875,22.25 96.75,22.25 113.525,22.25 122.5,22.25 134.25,22.25 140.375,16.125 145.125,16.125 145.125,42.75 148.15,45.775 160,45.775 160,77 154.5,77 154.5,75.25 152.375,73.125 146.25,73.125 146.25,101.875 150.375,106 150.375,110 130.625,110 130.625,106 129.375,104.75 129.375,94.3 125.075,90 64.25,90 63,88.75 63,69.35 49.225,69.35 47.5,67.625 47.5,60.125 41.875,54.5
GND_SFA26 on GND Layer "GND_SFA26_L03_P019" (solid, pour order 19): 74.1,93 74.1,110 63,110 63,93
GND_SFA25 on GND Layer "GND_SFA25_L03_P018" (solid, pour order 18): 74.975,110 74.975,93 86.075,93 86.075,110
GND_PS_CAN on GND Layer "GND_PS_CAN_L03_P026" (solid, pour order 26): 105.75,110 105.75,93 122.375,93 122.375,110
GND_PS on GND Layer "GND_PS_L03_P024" (solid, pour order 24): 87.25,110 87.25,93 98.75,93 98.75,110
AGND_HW on GND Layer "AGND_HW_L03_P001" (solid, remove dead copper, pour order 1): 3.6,51.5 3.6,48.1 19.1,48.1 20,49 20,68 8,68 8,59 8,51.5
GND_HW on GND Layer "GND_HW_L03_P002" (solid, remove dead copper, pour order 2): 0.5,68 7.1,68 7.1,52 2.8,52 2.8,47 23.2,47 23.2,9 17.5,9 15.7,7.2 15.7,4.5 10,4.5 10,9.25 0.5,9.25
GND_DRVA14 on GND Layer "GND_DRVA14_L03_P015" (solid, remove dead copper, pour order 15): 63.375,0 63.375,14.75 81.75,14.75 81.75,0
GND_DRVA16 on GND Layer "GND_DRVA16_L03_P017" (solid, remove dead copper, pour order 17): 114.625,0 114.625,14.75 133,14.75 133,0
GND_DRVA13 on GND Layer "GND_DRVA13_L03_P014" (solid, remove dead copper, pour order 14): 37.75,0 37.75,11.775 40.725,14.75 56.125,14.75 56.125,0
GND_DRVA15 on GND Layer "GND_DRVA15_L03_P012" (solid, remove dead copper, pour order 12): 89,0 89,14.75 107.375,14.75 107.375,0

## Silkscreen, mask and mechanical layers (free items; w line width, h text height)
Top Overlay:
  lines w0.2: 6.45,20.175 6.45,21.275 ; 6.45,22.325 6.45,21.275 ; 6.45,23.156 6.45,24.3 ; 6.45,25.4 6.45,24.3 ; 6.45,26.15 6.45,27.3 ; 6.45,28.5 6.45,27.3 ; 6.45,29.209 6.45,30.375 ; 6.45,31.65 6.45,30.375 ; 7.525,21.275 6.45,21.275 ; 7.525,24.3 6.45,24.3 ; 7.525,30.375 6.45,30.375 ; 7.55,27.3 6.45,27.3
  lines w0.254: 55.775,11.55 55.861,11.636 55.861,12.011 56.1,12.25 56.75,12.25 57.592,13.092 57.592,13.317 ; 55.8,13.05 56.15,13.05 56.5,13.05 56.7,13.25 ; 81.35,11.55 81.436,11.636 81.436,12.011 81.675,12.25 82.325,12.25 83.167,13.092 83.167,13.317 ; 81.375,13.05 81.725,13.05 82.075,13.05 82.275,13.25 ; 106.975,11.55 107.061,11.636 107.061,12.011 107.3,12.25 107.95,12.25 108.792,13.092 108.792,13.317 ; 107,13.05 107.35,13.05 107.7,13.05 107.9,13.25 ; 132.6,11.55 132.686,11.636 132.686,12.011 132.925,12.25 133.575,12.25 134.417,13.092 134.417,13.317 ; 132.625,13.05 132.975,13.05 133.325,13.05 133.525,13.25
Top Assy:
  circle w0.2: c155,105 r1.6
  circle w0.2: c155,5 r1.6
  circle w0.2: c5,105 r1.6
  circle w0.2: c5,5 r1.6
Bottom Assy:
  circle w0.2: c155,105 r1.6
  circle w0.2: c155,5 r1.6
  circle w0.2: c5,105 r1.6
  circle w0.2: c5,5 r1.6
Board Outline:
  the board outline again, w0.2